# Altium PCB SE_13.PcbDoc (part 3 of 3)
Units mil, origin at the board's own origin, x right, y up, seen from the top; angles counter-clockwise.
Board outline 3937.01 x 3937.01 mil, 4 copper layers (Top, GND, PWR, Bottom), stack 35.4 mil thick; 269 components, 124 nets, 773 pads, 1135 vias.
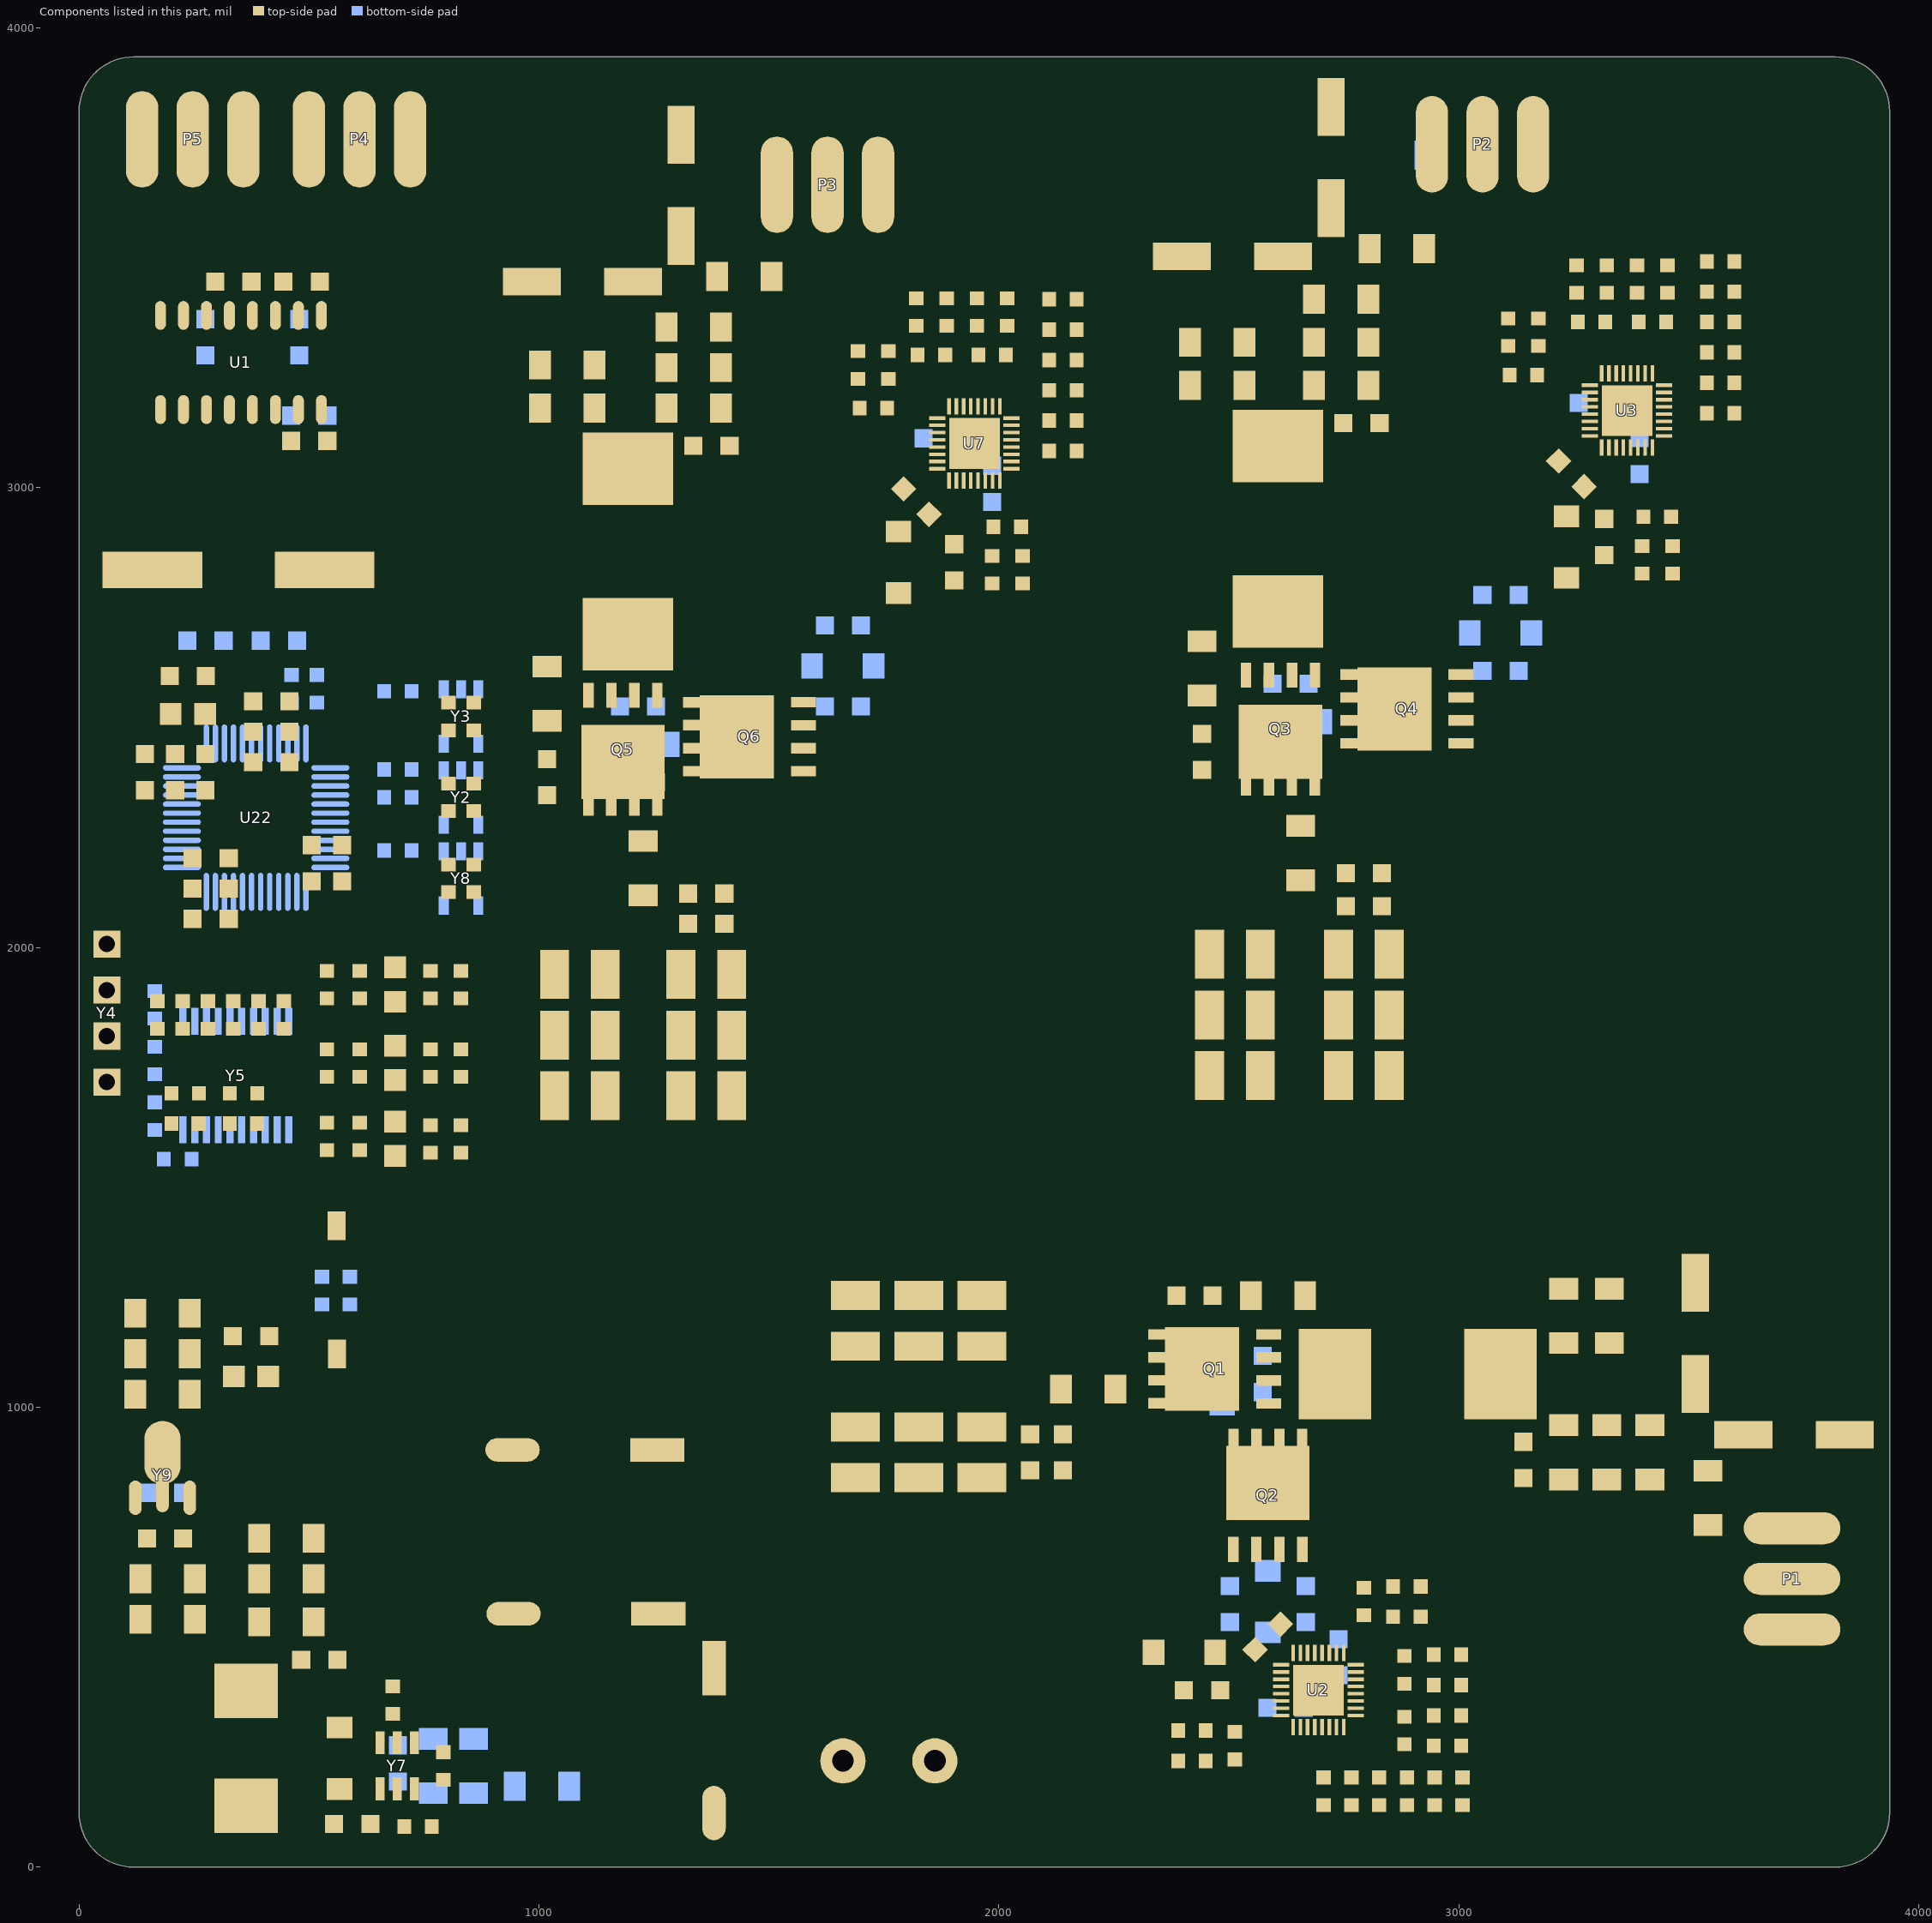
[diagram p5: the components of this part, seen from the top]

## Other copper (continued)
PWR:
  pour cut-out: 2985,1909.89 2985,1739.39 3029,1739.39 3029,1909.89 2985,1909.89
  pour cut-out: 3238,1898.89 3238,1744.89 3276.5,1744.89 3276.5,1898.89 3238,1898.89
  pour cut-out: 3111.5,1904.39 3111.5,1733.89 3150,1733.89 3150,1904.39 3111.5,1904.39
  pour cut-out: 1852,2349.89 1852,2300.39 1890.5,2300.39 1890.5,2349.89 1852,2349.89
  pour cut-out: 2864,1904.39 2864,1739.39 2902.5,1739.39 2902.5,1904.39 2864,1904.39
  pour cut-out: 26,710.89 26,452.39 64.5,452.39 64.5,710.89 26,710.89
  pour cut-out: 1456,3290.39 1456,3229.89 1494.5,3229.89 1494.5,3290.39 1456,3290.39
  pour cut-out: 1725.5,1689.89 1725.5,1640.39 1758.5,1640.39 1758.5,1689.89 1725.5,1689.89
  pour cut-out: 3133.5,705.39 3133.5,644.89 3172,644.89 3172,705.39 3133.5,705.39
  pour cut-out: 3183,1898.89 3183,1750.39 3216,1750.39 3216,1898.89 3183,1898.89
  pour cut-out: 2820,705.39 2820,655.89 2858.5,655.89 2858.5,705.39 2820,705.39
  pour cut-out: 3007,705.39 3007,650.39 3045.5,650.39 3045.5,705.39 3007,705.39
  pour cut-out: 2864,1552.39 2864,1508.39 2902.5,1508.39 2902.5,1552.39 2864,1552.39
  pour cut-out: 1709,2371.89 1709,2294.89 1758.5,2294.89 1758.5,2371.89 1709,2371.89
  pour cut-out: 1131.5,914.39 1131.5,820.89 1170,820.89 1170,914.39 1131.5,914.39
  pour cut-out: 2083,1689.89 2083,1645.89 2121.5,1645.89 2121.5,1689.89 2083,1689.89
  pour cut-out: 81,1975.89 81,1799.89 97.5,1799.89 97.5,1975.89 81,1975.89
  pour cut-out: 2281,1816.39 2281,1629.39 2512,1629.39 2512,1816.39 2281,1816.39
  pour cut-out: 2308.5,2415.89 2308.5,2344.39 2484.5,2344.39 2484.5,2415.89 2308.5,2415.89
  pour cut-out: 2352.5,1288.39 2352.5,1321.39 2314,1321.39 2314,1288.39 2352.5,1288.39
  pour cut-out: 889.5,908.89 889.5,815.39 928,815.39 928,908.89 889.5,908.89
  pour cut-out: 3238,1557.89 3238,1519.39 3276.5,1519.39 3276.5,1557.89 3238,1557.89
  pour cut-out: 1648.5,1695.39 1648.5,1645.89 1687,1645.89 1687,1695.39 1648.5,1695.39
  pour cut-out: 2473.5,2058.39 2473.5,1997.89 2512,1997.89 2512,2058.39 2473.5,2058.39
  pour cut-out: 1010.5,914.39 1010.5,815.39 1049,815.39 1049,914.39 1010.5,914.39
  pour cut-out: 1621,155.39 1621,144.39 1665,144.39 1665,155.39 1621,155.39
  pour cut-out: 2644,430.39 2644,331.39 2743,331.39 2743,430.39 2644,430.39
  pour cut-out: 1588,3290.39 1588,3114.39 1626.5,3114.39 1626.5,3290.39 1588,3290.39
  pour cut-out: 2341.5,2058.39 2341.5,2003.39 2385.5,2003.39 2385.5,2058.39 2341.5,2058.39
  pour cut-out: 2286.5,3444.39 2286.5,3119.89 2484.5,3119.89 2484.5,3444.39 2286.5,3444.39
  pour cut-out: 1929,1689.89 1929,1645.89 1967.5,1645.89 1967.5,1689.89 1929,1689.89
  pour cut-out: 1489,3746.89 1489,3631.39 1527.5,3631.39 1527.5,3746.89 1489,3746.89
  pour cut-out: 152.5,1596.39 147,1596.39 147,1552.39 152.5,1552.39 152.5,1596.39
  pour cut-out: 1071,914.39 1071,809.89 1109.5,809.89 1109.5,914.39 1071,914.39
  pour cut-out: 1456,3169.39 1456,3114.39 1500,3114.39 1500,3169.39 1456,3169.39
  pour cut-out: 1131.5,1150.89 1131.5,1101.39 1170,1101.39 1170,1150.89 1131.5,1150.89
  pour cut-out: 1604.5,2371.89 1648.5,2371.89 1648.5,2377.39 1604.5,2377.39 1604.5,2371.89
  pour cut-out: 2990.5,1552.39 2990.5,1508.39 3029,1508.39 3029,1552.39 2990.5,1552.39
  pour cut-out: 1918,2481.89 1918,2426.89 1962,2426.89 1962,2481.89 1918,2481.89
  pour cut-out: 2325,1920.89 2325,1827.39 2479,1827.39 2479,1920.89 2325,1920.89
  pour cut-out: 31.5,1332.39 31.5,1255.39 158,1255.39 158,1332.39 31.5,1332.39
  pour cut-out: 1439.5,1689.89 1439.5,1651.39 1478,1651.39 1478,1689.89 1439.5,1689.89
  pour cut-out: 1923.5,2360.89 1923.5,2300.39 1962,2300.39 1962,2360.89 1923.5,2360.89
  pour cut-out: 1010.5,1150.89 1010.5,1101.39 1049,1101.39 1049,1150.89 1010.5,1150.89
  pour cut-out: 2699,705.39 2699,655.89 2732,655.89 2732,705.39 2699,705.39
  pour cut-out: 1995,1689.89 1995,1640.39 2033.5,1640.39 2033.5,1689.89 1995,1689.89
  pour cut-out: 3051,1557.89 3051,1508.39 3095,1508.39 3095,1557.89 3051,1557.89
  pour cut-out: 3073,705.39 3073,650.39 3106,650.39 3106,705.39 3073,705.39
  pour cut-out: 3111.5,1552.39 3111.5,1513.89 3150,1513.89 3150,1552.39 3111.5,1552.39
  pour cut-out: 2292,930.89 2292,617.39 2358,617.39 2358,930.89 2292,930.89
  pour cut-out: 884,1150.89 884,1106.89 928,1106.89 928,1150.89 884,1150.89
  pour cut-out: 3315,3213.39 3315,3114.39 3419.5,3114.39 3419.5,3213.39 3315,3213.39
  pour cut-out: 1615.5,3746.89 1615.5,3625.89 1659.5,3625.89 1659.5,3746.89 1615.5,3746.89
  pour cut-out: 675,567.89 675,474.39 702.5,474.39 702.5,567.89 675,567.89
  pour cut-out: 2413,2058.39 2413,1997.89 2446,1997.89 2446,2058.39 2413,2058.39
  pour cut-out: 1522,3290.39 1522,3229.89 1555,3229.89 1555,3290.39 1522,3290.39
  pour cut-out: 950,1150.89 950,1106.89 983,1106.89 983,1150.89 950,1150.89
  pour cut-out: 2798,1552.39 2798,1513.89 2836.5,1513.89 2836.5,1552.39 2798,1552.39
  pour cut-out: 2490,419.39 2490,386.39 2539.5,386.39 2539.5,419.39 2490,419.39
  pour cut-out: 1373.5,1689.89 1373.5,1656.89 1412,1656.89 1412,1689.89 1373.5,1689.89
  pour cut-out: 1511,1689.89 1511,1645.89 1549.5,1645.89 1549.5,1689.89 1511,1689.89
  pour cut-out: 1065.5,1150.89 1065.5,1106.89 1104,1106.89 1104,1150.89 1065.5,1150.89
  pour cut-out: 3161,826.39 3161,815.39 3205,815.39 3205,826.39 3161,826.39
  pour cut-out: 2286.5,3757.89 2286.5,3631.39 2325,3631.39 2325,3757.89 2286.5,3757.89
  pour cut-out: 1857.5,1700.89 1857.5,1640.39 1896,1640.39 1896,1700.89 1857.5,1700.89
  pour cut-out: 1736.5,28.89 1736.5,61.89 1027,61.89 1027,28.89 1736.5,28.89
  pour cut-out: 1621,314.89 1621,309.39 1665,309.39 1665,314.89 1621,314.89
  pour cut-out: 2930,1904.39 2930,1739.39 2968.5,1739.39 2968.5,1904.39 2930,1904.39
  pour cut-out: 1901.5,3141.89 1901.5,3042.89 1995,3042.89 1995,3141.89 1901.5,3141.89
  pour cut-out: 1010.5,1678.89 1010.5,1673.39 1060,1673.39 1060,1678.89 1010.5,1678.89
  pour cut-out: 1401,2047.39 1401,1975.89 2028,1975.89 2028,2047.39 1401,2047.39
  pour cut-out: 2759.5,2349.89 2759.5,2223.39 3348,2223.39 3348,2349.89 2759.5,2349.89
  pour cut-out: 1786,2360.89 1786,2305.89 1824.5,2305.89 1824.5,2360.89 1786,2360.89
  pour cut-out: 1582.5,1695.39 1582.5,1645.89 1621,1645.89 1621,1695.39 1582.5,1695.39
  pour cut-out: 1390,3169.39 1390,3119.89 1428.5,3119.89 1428.5,3169.39 1390,3169.39
  pour cut-out: 1786,1695.39 1786,1645.89 1824.5,1645.89 1824.5,1695.39 1786,1695.39
  pour cut-out: 1945.5,1260.89 1648.5,1260.89 1648.5,1194.89 1945.5,1194.89 1945.5,1260.89
  pour cut-out: 3045.5,1904.39 3045.5,1733.89 3089.5,1733.89 3089.5,1904.39 3045.5,1904.39
  pour cut-out: 383.5,2327.89 383.5,2261.89 416.5,2261.89 416.5,2327.89 383.5,2327.89
  pour cut-out: 2759.5,699.89 2759.5,655.89 2792.5,655.89 2792.5,699.89 2759.5,699.89
  pour cut-out: 2352.5,3763.39 2352.5,3625.89 2495.5,3625.89 2495.5,3763.39 2352.5,3763.39
  pour cut-out: 2930,1552.39 2930,1508.39 2968.5,1508.39 2968.5,1552.39 2930,1552.39
  pour cut-out: 3194,705.39 3194,650.39 3232.5,650.39 3232.5,705.39 3194,705.39
  pour cut-out: 2281,2058.39 2281,1997.89 2319.5,1997.89 2319.5,2058.39 2281,2058.39
  pour cut-out: 2798,1909.89 2798,1744.89 2836.5,1744.89 2836.5,1909.89 2798,1909.89
  pour cut-out: 2941,705.39 2941,650.39 2979.5,650.39 2979.5,705.39 2941,705.39
  pour cut-out: 2011.5,1315.89 2011.5,1249.89 2171,1249.89 2171,1315.89 2011.5,1315.89
  pour cut-out: 2897,3796.39 2897,3669.89 2974,3669.89 2974,3796.39 2897,3796.39
  pour cut-out: 3177.5,1552.39 3177.5,1513.89 3216,1513.89 3216,1552.39 3177.5,1552.39
  pour cut-out: 2880.5,705.39 2880.5,644.89 2919,644.89 2919,705.39 2880.5,705.39
  pour cut-out: 2605.5,3796.39 2605.5,3763.39 2710,3763.39 2710,3796.39 2605.5,3796.39
  pour cut-out: 950,914.39 950,820.89 988.5,820.89 988.5,914.39 950,914.39
  pour cut-out: 2303,3900.89 2303,3862.39 2952,3862.39 2952,3900.89 2303,3900.89
  pour cut-out: 2594.5,3741.39 2594.5,3702.89 2704.5,3702.89 2704.5,3741.39 2594.5,3741.39
  pour cut-out: 614.5,562.39 614.5,435.89 647.5,435.89 647.5,562.39 614.5,562.39
  pour cut-out: 2149,1689.89 2149,1640.39 2187.5,1640.39 2187.5,1689.89 2149,1689.89
  pour cut-out: 1522,3174.89 1522,3125.39 1560.5,3125.39 1560.5,3174.89 1522,3174.89
  pour cut-out: 3254.5,705.39 3254.5,655.89 3293,655.89 3293,705.39 3254.5,705.39
  pour cut-out: 889.5,452.39 889.5,386.39 966.5,386.39 966.5,452.39 889.5,452.39

## Silkscreen, mask and mechanical layers (free items; w line width, h text height)
Silkscreen Top:
  text "-" at 2975.5,3949 h200 r180
  text "+" at 3080,3932.5 h120 r180
  text "-" at 1562,3899.5 h200 r180
  text "+" at 1677.5,3888.5 h150 r180
  text "S" at 3140.5,3877.5 h100
  text "S" at 1716,3817 h120
  text "細米露" at 3327.5,3685 h190
  text "G" at 115.5,3542 h120
  text "R" at 220,3542 h120
  text "T" at 324.5,3542 h120
  text "G" at 473,3542 h120
  text "R" at 577.5,3542 h120
  text "T" at 682,3542 h120
  text "G" at 27.5,2370.5 h100 r270
  text "K" at 27.5,2293.5 h100 r270
  text "O" at 27.5,2222 h100 r270
  text "+" at 22,2150.5 h150 r270
  text "-" at 3938,698.5 h200 r90
  text "+" at 3927,588.5 h150 r90
  text "S" at 3927,489.5 h120 r90
  text "IN+" at 1991,49.5 h150
  text "-" at 1628,33 h180
  text "+" at 1804,33 h180